# EAGLE board frets-main-board2 (EAGLE 6.6.0)
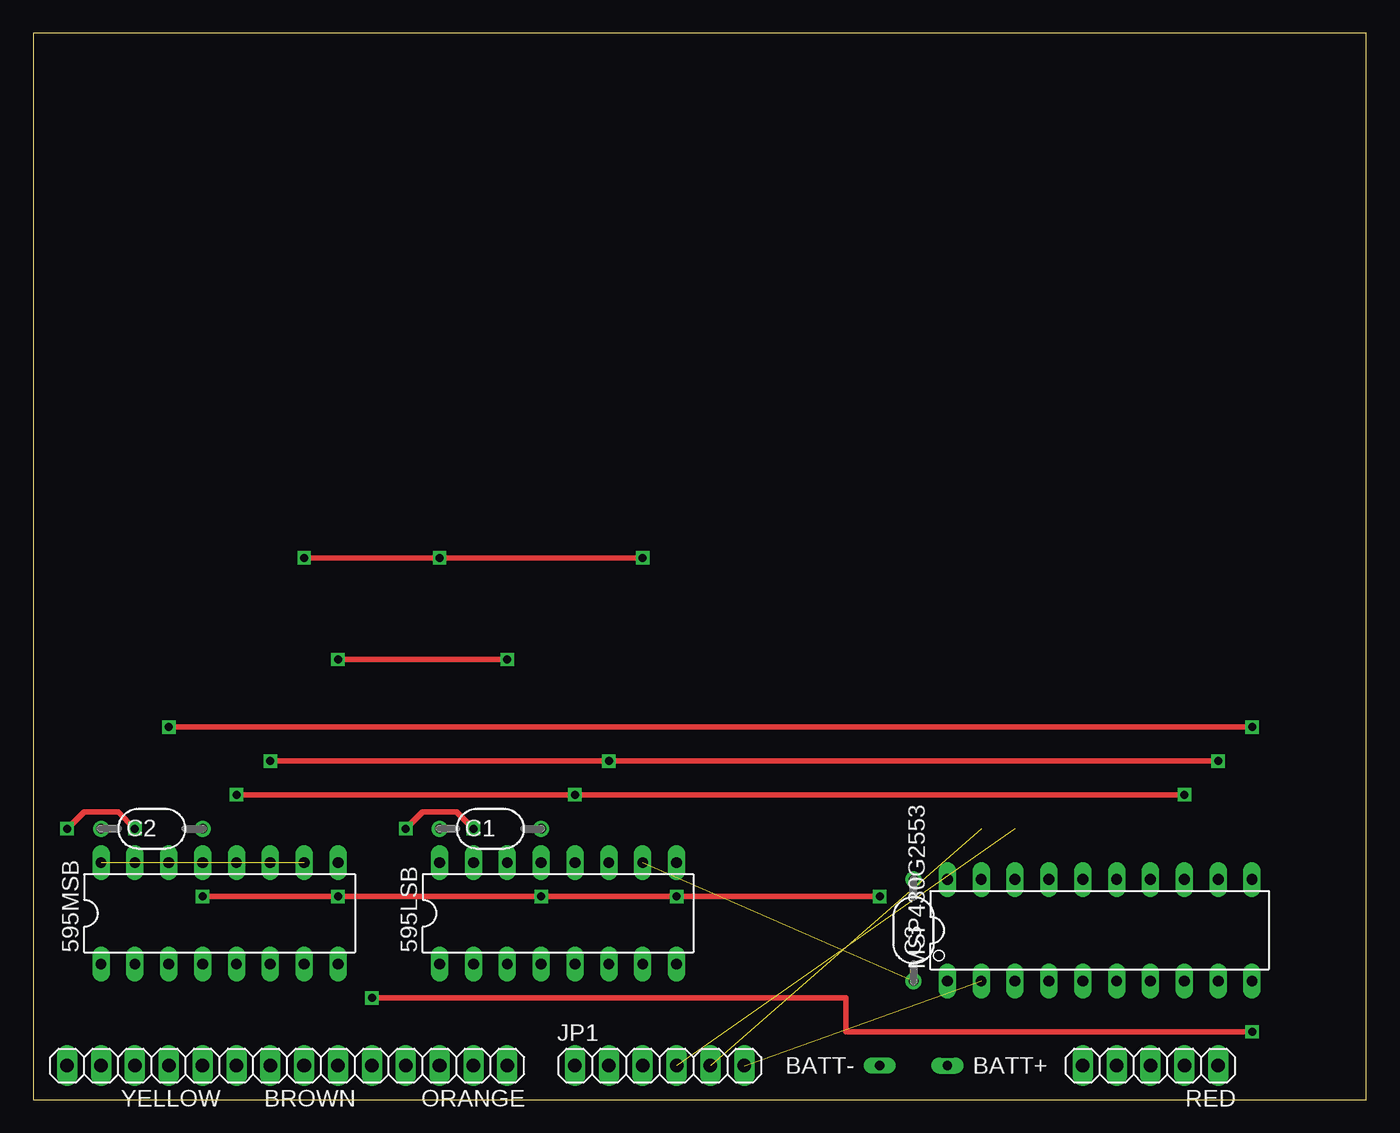
[diagram p0: board, top side]
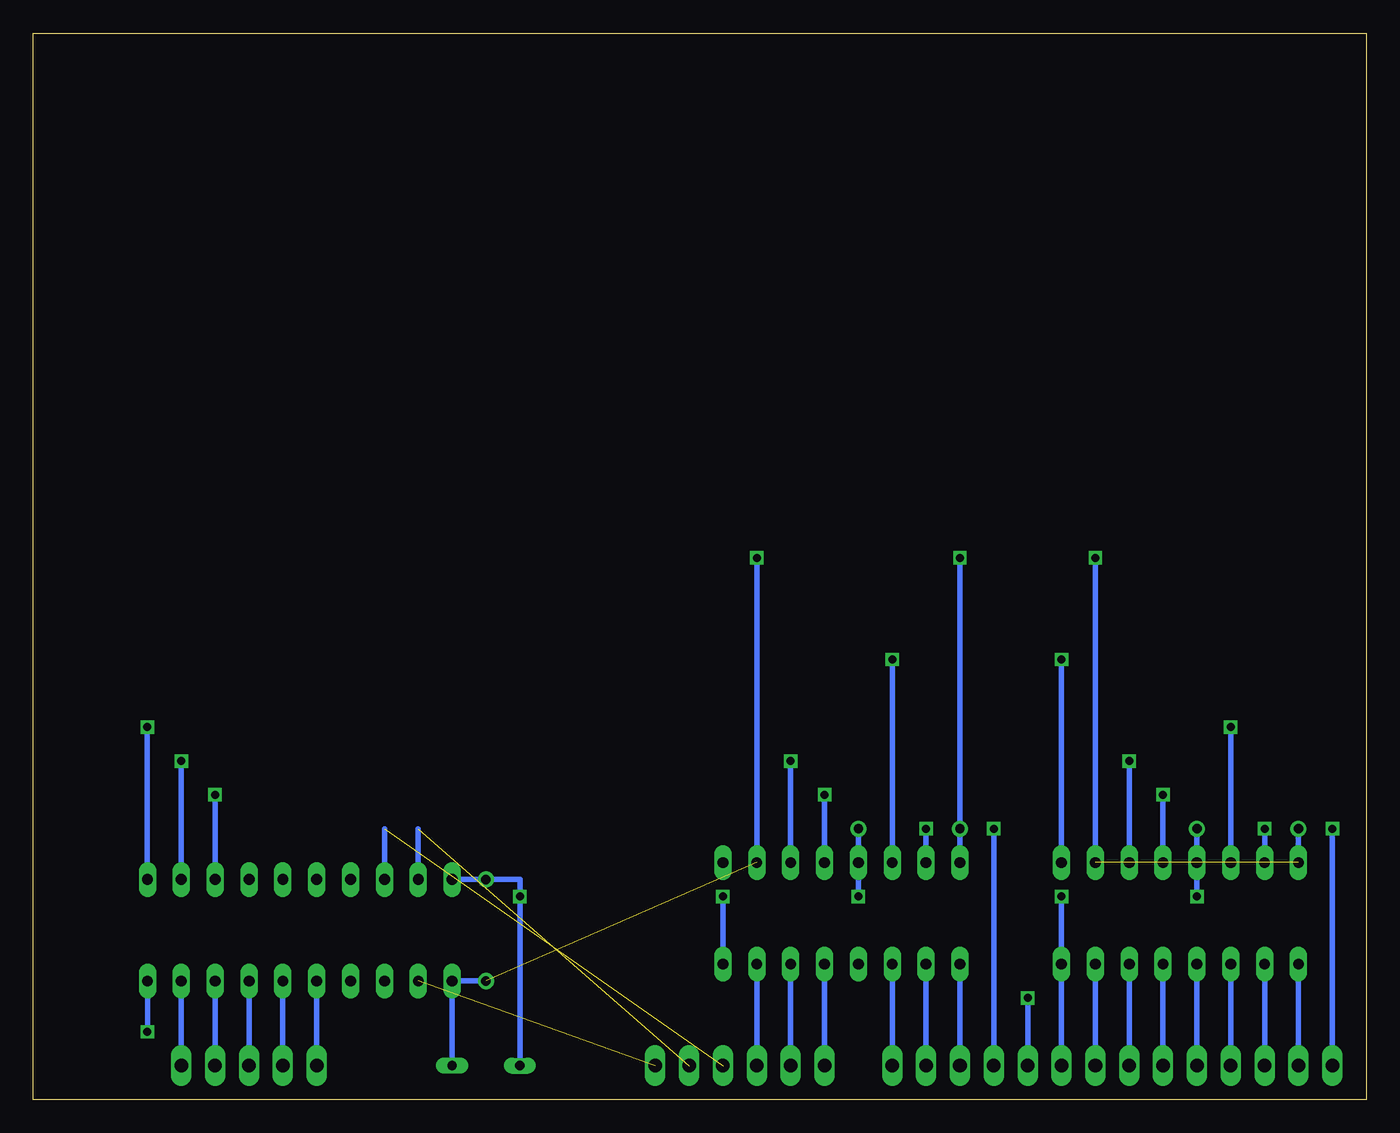
[diagram p1: board, bottom side, seen from below]

Size 100 x 80 mm. Coordinates in mm from the lower left corner, seen from the top.
Outline: 0,0 100,0 100,80 0,80 0,0
Copper layers (1*16): Top 0.035mm / dielectric 1.5mm / Bottom 0.035mm
Design rules "default": minimum track width 10mil, minimum drill 24mil, track to track 8mil, track to pad 8mil, pad to pad 8mil, via to via 8mil, smd to smd 8mil, copper to edge 40mil, drill to drill 8mil, minimum pad ring 10mil, minimum via ring 8mil, stop-mask expansion 4mil, vias tented up to drill 0mil, thermal gap 10mil

## Footprints (pad centres in the part's own frame; a part is rotated, then mirrored left to right if it is on the bottom)
DIL16 = drill 0.813 long: 1 -8.89,-3.81; 2 -6.35,-3.81; 3 -3.81,-3.81; 4 -1.27,-3.81; 5 1.27,-3.81; 6 3.81,-3.81; 7 6.35,-3.81; 8 8.89,-3.81; 9 8.89,3.81; 10 6.35,3.81; 11 3.81,3.81; 12 1.27,3.81; 13 -1.27,3.81; 14 -3.81,3.81; 15 -6.35,3.81; 16 -8.89,3.81
LONG = drill 0.7 long: 1 0,0
1X04 = drill 1.016 long: 1 -3.81,0; 2 -1.27,0; 3 1.27,0; 4 3.81,0
050X030_050_3 = drill 0.7: 1 -3.81,0; 2 3.81,0
1X06 = drill 1.016 long: 1 -6.35,0; 2 -3.81,0; 3 -1.27,0; 4 1.27,0; 5 3.81,0; 6 6.35,0
N20 = drill 0.813 long: 1 -11.435,-3.81; 2 -8.895,-3.81; 3 -6.355,-3.81; 4 -3.815,-3.81; 5 -1.275,-3.81; 6 1.265,-3.81; 7 3.805,-3.81; 8 6.345,-3.81; 9 8.885,-3.81; 10 11.425,-3.81; 11 11.425,3.81; 12 8.885,3.81; 13 6.345,3.81; 14 3.805,3.81; 15 1.265,3.81; 16 -1.275,3.81; 17 -3.815,3.81; 18 -6.355,3.81; 19 -8.895,3.81; 20 -11.435,3.81
1X05 = drill 1.016 long: 1 -5.08,0; 2 -2.54,0; 3 0,0; 4 2.54,0; 5 5.08,0

## Placement (x,y rotation side)
595LSB  74LS595N  [DIL16]  39.37,13.97 0 top
595MSB  74LS595N  [DIL16]  13.97,13.97 0 top
BATT+  [LONG]  68.58,2.54 0 top
BATT-  [LONG]  63.5,2.54 180 top
BROWN  [1X04]  19.05,2.54 180 top
C1  100n  [050X030_050_3]  34.29,20.32 0 top
C2  100n  [050X030_050_3]  8.89,20.32 0 top
C3  100n  [050X030_050_3]  66.04,12.7 90 top
JP1  [1X06]  46.99,2.54 0 top
MSP430G2553  G2XX3---N20  [N20]  80.01,12.7 0 top
ORANGE  [1X05]  30.48,2.54 180 top
RED  [1X05]  83.82,2.54 180 top
YELLOW  [1X05]  7.62,2.54 180 top

## Library data of the parts
595LSB 595MSB = 74xx-us
BATT+ BATT- = gm-supply
BROWN JP1 ORANGE RED YELLOW = pinhead
C1-C3 = gm-caps-ceramic
MSP430G2553 = TI_MSP430_v16

## Nets
_RST: MSP430G2553.16
A_IN: JP1.6 MSP430G2553.2
D0: MSP430G2553.5 RED.5
D1: MSP430G2553.6 RED.4
D2: MSP430G2553.7 RED.3
D3: MSP430G2553.8 RED.2
D4: MSP430G2553.9 RED.1
D5: MSP430G2553.10 ORANGE.5
GND: 595LSB.8 595LSB.13 595MSB.8 595MSB.13 BATT-.1 BROWN.1 C1.2 C2.2 C3.2 MSP430G2553.20
INH_A: JP1.4 MSP430G2553.18
INH_B: JP1.5 MSP430G2553.19
MX_A: 595LSB.5 JP1.1
MX_B: 595LSB.6 JP1.2
MX_C: 595LSB.7 JP1.3
N$1: 595LSB.14 595MSB.9
RCK: 595LSB.12 595MSB.12 MSP430G2553.13
RXD: MSP430G2553.3
SCK: 595LSB.11 595MSB.11 MSP430G2553.12
SCL: MSP430G2553.14
SDA: MSP430G2553.15
SER: 595MSB.14 MSP430G2553.11
SR3: 595LSB.4
SR4: 595LSB.3 ORANGE.1
SR5: 595LSB.2 ORANGE.2
SR6: 595LSB.1 ORANGE.3
SR7: 595LSB.15 ORANGE.4
SR8: 595MSB.7 BROWN.2
SR9: 595MSB.6 BROWN.3
SR10: 595MSB.5 BROWN.4
SR11: 595MSB.4 YELLOW.1
SR12: 595MSB.3 YELLOW.2
SR13: 595MSB.2 YELLOW.3
SR14: 595MSB.1 YELLOW.4
SR15: 595MSB.15 YELLOW.5
TEST: MSP430G2553.17
TXD: MSP430G2553.4
VA: 595LSB.10 595LSB.16 595MSB.10 595MSB.16 BATT+.1 C1.1 C2.1 C3.1 MSP430G2553.1

## Tracks (layer width: path | path; a pad name or v marks a point on that pad's centre or on a via)
A_IN  (1 unrouted)
D0
  Bottom 0.406: RED.5 MSP430G2553.5
D1
  Bottom 0.406: RED.4 MSP430G2553.6
D2
  Bottom 0.406: RED.3 MSP430G2553.7
D3
  Bottom 0.406: RED.2 MSP430G2553.8
D4
  Bottom 0.406: RED.1 MSP430G2553.9
D5  (via drill 0.6)
  Top 0.406: v25.4,7.62 60.96,7.62 60.96,5.08 v91.44,5.08
  Bottom 0.406: ORANGE.5 v25.4,7.62 | v91.44,5.08 MSP430G2553.10
GND  (via drill 0.6)
  Top 0.406: v12.7,15.24 v22.86,15.24 v38.1,15.24 v48.26,15.24 v63.5,15.24
  Bottom 0.406: BROWN.1 595MSB.8 v22.86,15.24 | MSP430G2553.20 C3.2 63.5,16.51 v63.5,15.24 BATT-.1 | C2.2 595MSB.13 v12.7,15.24 | C1.2 595LSB.13 v38.1,15.24 | v48.26,15.24 595LSB.8
INH_A  (1 unrouted)
  Bottom 0.406: MSP430G2553.18 73.66,20.32
INH_B  (1 unrouted)
  Bottom 0.406: MSP430G2553.19 71.12,20.32
MX_A
  Bottom 0.406: 595LSB.5 JP1.1
MX_B
  Bottom 0.406: 595LSB.6 JP1.2
MX_C
  Bottom 0.406: 595LSB.7 JP1.3
N$1  (via drill 0.6)
  Top 0.406: v22.86,33.02 v35.56,33.02
  Bottom 0.406: 595MSB.9 v22.86,33.02 | v35.56,33.02 595LSB.14
RCK  (via drill 0.6)
  Top 0.406: v15.24,22.86 v40.64,22.86 v86.36,22.86
  Bottom 0.406: 595LSB.12 v40.64,22.86 | v15.24,22.86 595MSB.12 | MSP430G2553.13 v86.36,22.86
SCK  (via drill 0.6)
  Top 0.406: v17.78,25.4 v43.18,25.4 v88.9,25.4
  Bottom 0.406: 595LSB.11 v43.18,25.4 | v17.78,25.4 595MSB.11 | MSP430G2553.12 v88.9,25.4
SER  (via drill 0.6)
  Top 0.406: v91.44,27.94 v10.16,27.94
  Bottom 0.406: MSP430G2553.11 v91.44,27.94 | v10.16,27.94 595MSB.14
SR4
  Bottom 0.406: ORANGE.1 595LSB.3
SR5
  Bottom 0.406: 595LSB.2 ORANGE.2
SR6
  Bottom 0.406: ORANGE.3 595LSB.1
SR7  (via drill 0.6)
  Top 0.406: v27.94,20.32 29.21,21.59 31.75,21.59 v33.02,20.32
  Bottom 0.406: ORANGE.4 v27.94,20.32 | v33.02,20.32 595LSB.15
SR8
  Bottom 0.406: 595MSB.7 BROWN.2
SR9
  Bottom 0.406: 595MSB.6 BROWN.3
SR10
  Bottom 0.406: BROWN.4 595MSB.5
SR11
  Bottom 0.406: YELLOW.1 595MSB.4
SR12
  Bottom 0.406: YELLOW.2 595MSB.3
SR13
  Bottom 0.406: 595MSB.2 YELLOW.3
SR14
  Bottom 0.406: YELLOW.4 595MSB.1
SR15  (via drill 0.6)
  Top 0.406: v2.54,20.32 3.81,21.59 6.35,21.59 v7.62,20.32
  Bottom 0.406: YELLOW.5 v2.54,20.32 | v7.62,20.32 595MSB.15
VA  (via drill 0.6)  (2 unrouted)
  Top 0.406: v20.32,40.64 v30.48,40.64 v45.72,40.64
  Bottom 0.406: 595MSB.10 v20.32,40.64 | BATT+.1 MSP430G2553.1 C3.1 | C2.1 595MSB.16 | 595LSB.16 C1.1 v30.48,40.64 | 595LSB.10 v45.72,40.64